# Allegro board ir_board-dvt-0514.brd
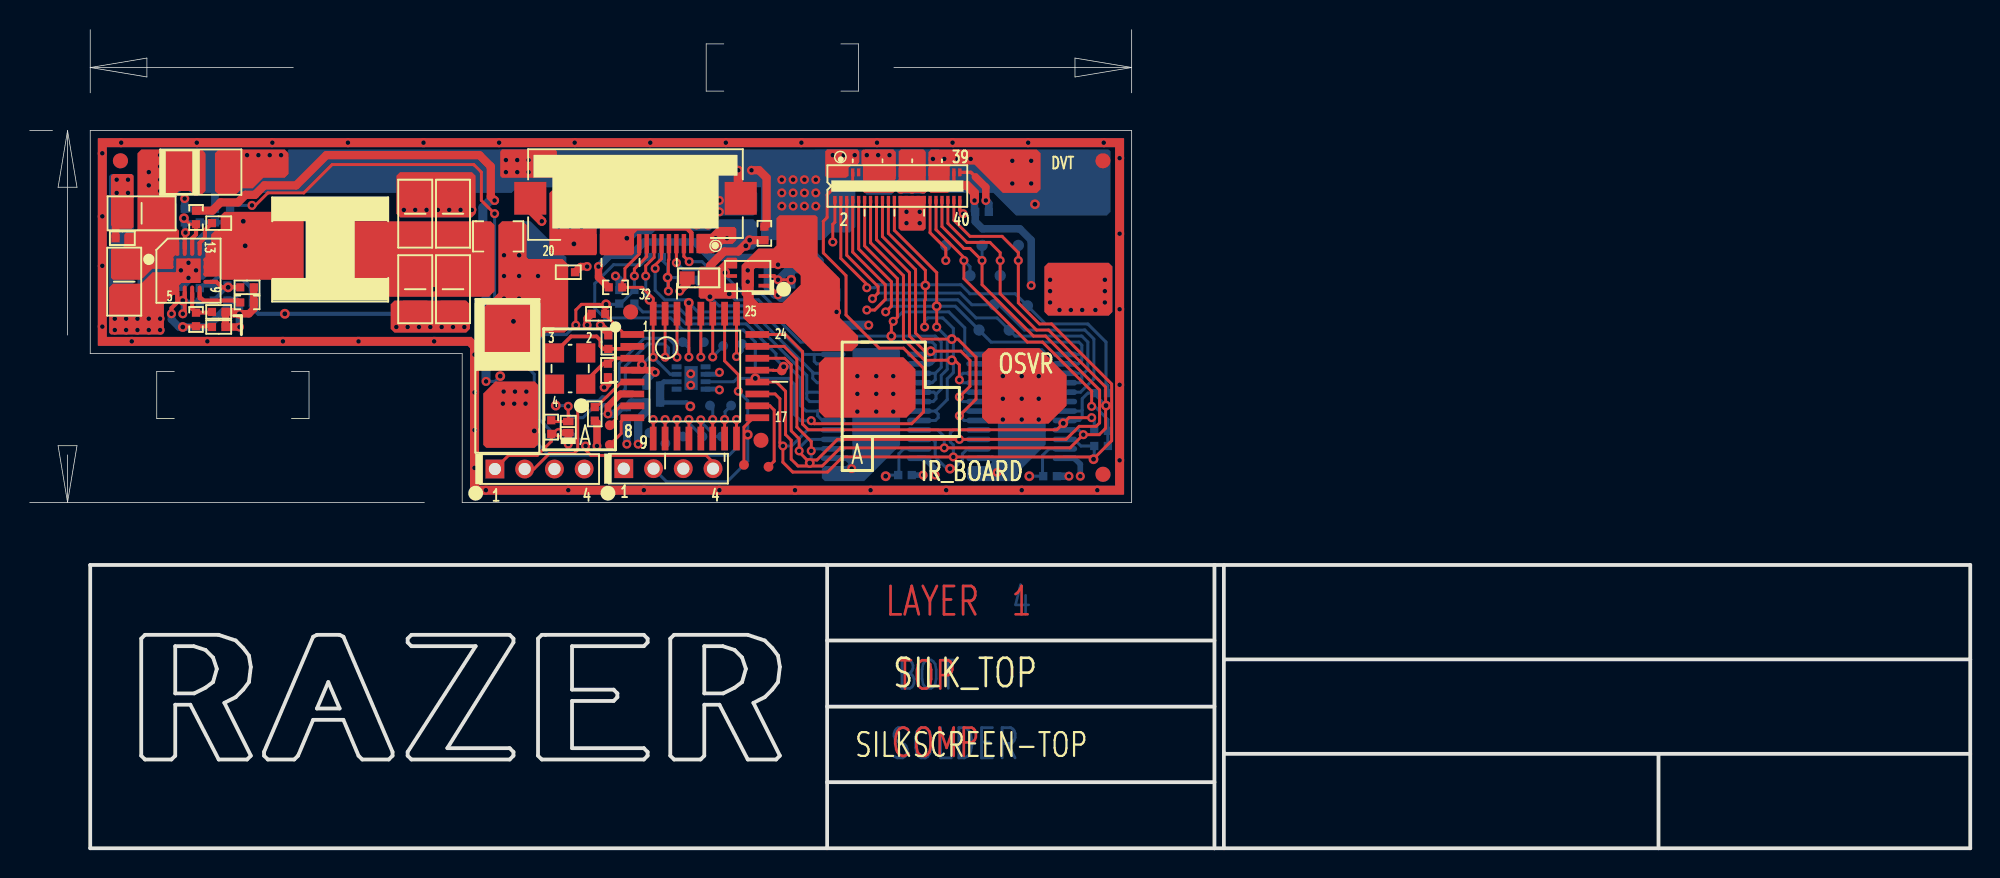
[diagram p0: board, top side]
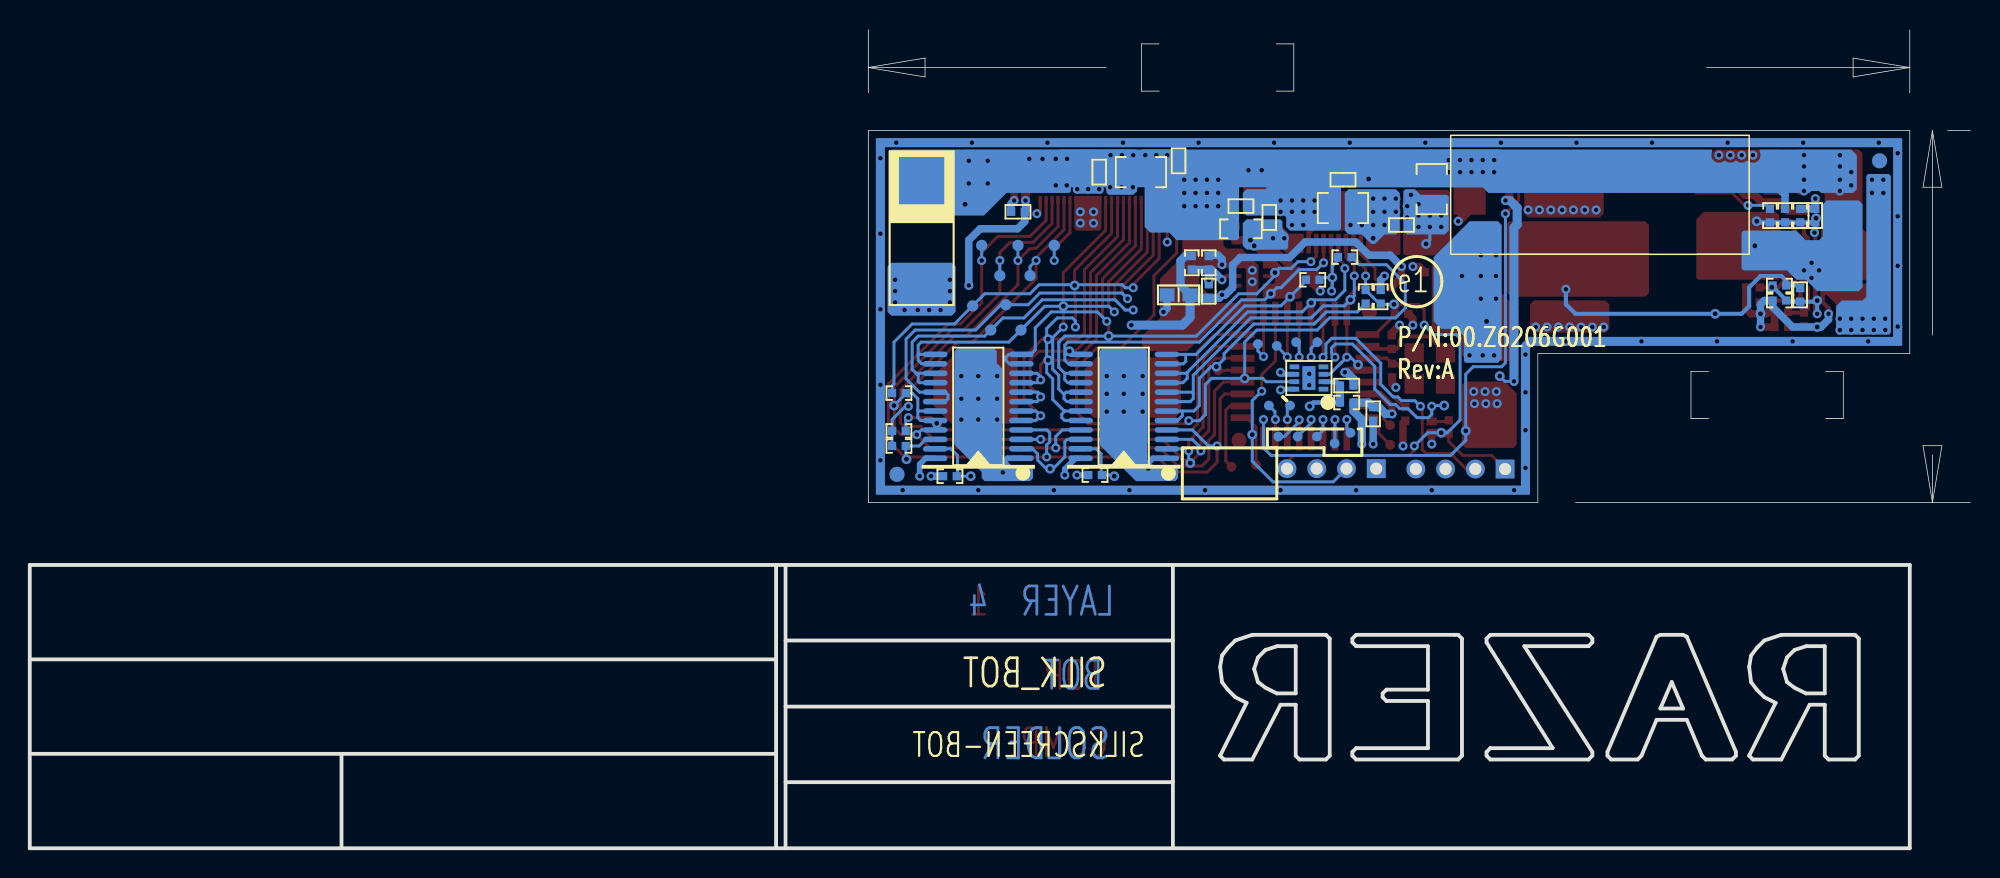
[diagram p1: board, bottom side, seen from below]

Outline 130.43 x 55.04 mm; copper layers: TOP, GND, VCC, BOTTOM. Coordinates in mm from the lower left corner of the outline.
Outline path: 4.06,48.26 74.06,48.26 74.06,23.26 29.06,23.26 29.06,33.26 4.06,33.26 4.06,48.26

## Placement (name value [footprint] x y rotation side)
C1  0.1uF  [C0402]  38.23 41.91 0 bottom
C2  6TPE220MAZB  [TANB]  11.68 45.47 0 top
C3  0.1uF  [C0402]  42.16 44.96 0 bottom
C4  0.1uF  [C0402]  53.21 46.23 90 bottom
C5  0.1uF  [C0402]  58.55 45.47 270 bottom
C6  4TPE470ML  [TAND]  70.49 41.53 270 bottom
C7  0.1uF  [C0402]  49.02 43.18 180 bottom
C8  0.1uF  [C0402]  47.12 42.42 90 bottom
C9  0.1uF  [C0402]  64.01 42.8 0 bottom
C10  NC_47uF  [C1206]  6.35 38.1 270 top
C11  47uF  [C1206]  7.52 42.7 180 top
C12  0.1uF  [C0402]  6.22 41.02 180 top
C13  390pF  [C0402]  11.43 37.21 270 bottom
C14  0.1uF/25V  [C0402]  12.7 42.04 180 top
C15  47uF  [C1206]  25.91 42.67 90 top
C16  47uF  [C1206]  28.45 42.67 90 top
C17  0.1uF  [C0402]  36.2 38.73 0 top
C18  0.1uF  [C0402]  10.41 42.55 270 bottom
C19  15nF  [C0402]  14.61 37.72 0 top
C20  2.7nF  [C0402]  12.7 35.05 0 top
C21  47uF  [C1206]  25.91 37.59 270 top
C22  47uF  [C1206]  28.45 37.59 270 top
C23  56pF  [C0402]  12.7 36.07 0 top
C24  0.1uF  [C0402]  51.18 37.46 90 bottom
C25  10uF  [C0603]  53.21 37.21 0 bottom
C26  10uF  [C0603]  44.96 38.35 180 top
C27  0.1uF  [C0402]  40.13 29.21 270 bottom
C28  NC_33pF  [C0402]  38.89 34.04 90 top
C29  4.7uF  [C0402]  37.97 29.21 270 top
C30  NC_33pF_NC  [C0402]  38.86 32.13 270 top
C31  0.1uF  [C0402]  38.23 35.94 0 top
C32  4.7uF  [C0402]  41.91 31.11 180 bottom
C33  4TPE470ML  [TAND]  32.11 31.6 270 top
D1  CDBQR0230L  [COMCHIP_CDBQR0230L-HF]  36.2 28.32 90 top
FFC  FFC  [TPC30T]  7.63 49.92 0 top
L1  2.2 uH  [VISHAY_IHLP-2525CZ-01]  20.19 40.26 180 top
NOREF  -  []  29.06 23.26 90 top
NOREF#2  -  [unnamed#2]  72.14 25.15 0 top
NOREF#3  -  []  4.06 48.26 0 top
NOREF#4  -  [unnamed#2]  72.14 46.23 0 top
NOREF#5  -  [unnamed#2]  6.1 46.23 0 top
NOREF#6  -  []  4.06 0 0 top
NOREF#7  -  [unnamed#2]  6.1 46.23 180 bottom
NOREF#8  -  [unnamed#2]  72.14 25.15 180 bottom
P1  ACES_50502-20_20PIN_FPC  [ACES_50502-20]  40.71 40.66 180 top
P2  JAE-WP7B-P040VA1  [JAE_WP7B-PXXXVA1]  58.31 44.53 0 top
P3  NO install  [JP4-2MM]  42.93 25.53 0 top
P4  NO install  [JP4-2MM]  34.26 25.5 0 top
PCB  PCB  [TPC30T]  9.74 49.92 0 top
R1  0  [R0805]  36.2 44.31 270 bottom
R2  0  [R0805]  42.15 43.05 180 bottom
R3  0  [R0805]  55.75 45.47 0 bottom
R4  0  [R0603]  49.02 41.66 180 bottom
R5  36.5K  [R0402]  12.83 37.85 180 bottom
R6  10K_NC  [R0402]  12.45 42.55 270 bottom
R7  10K  [R0402]  13.46 42.55 270 bottom
R8  0  [R0805]  31.5 41.15 0 top
R9  10K  [R0402]  11.43 42.55 270 bottom
R10  78.7K  [R0402]  14.61 36.7 0 top
R11  10K  [R0402]  12.83 36.83 180 bottom
R12  10K  [R0402]  11.18 42.42 270 top
R13  20.5K  [R0402]  11.18 35.56 270 top
R14  0  [R0402]  49.38 41.35 270 top
R16  52.3K  [R0402]  52.32 39.37 270 bottom
R17  30.1K  [R0402]  51.18 39.37 270 bottom
R19  0  [R0402]  72.01 30.61 0 bottom
R20  0  [R0402]  72.01 27.05 180 bottom
R21  330  [R0402]  58.83 25.1 180 bottom
R22  330  [R0402]  68.58 25.02 180 bottom
R23  NI  [R0402]  72.01 28.07 180 bottom
R24  4.99K  [R0402]  39.37 37.72 0 top
R25  120  [R0402]  35.05 28.32 90 top
R26  75  [R0402]  41.91 29.97 180 bottom
R27  0  [R0402]  40.64 37.08 270 bottom
R28  0_NC  [R0402]  39.62 37.08 90 bottom
R29  0  [R0402]  44.2 38.23 0 bottom
R30  0_NC  [R0402]  42.04 39.75 180 bottom
TP1  TP_1mm  [TPC30T#2]  66.45 40.54 180 bottom
TP2  TP_1mm  [TPC30T#2]  65.23 38.51 180 bottom
TP3  TP_1mm  [TPC30T#2]  64.01 40.54 180 bottom
TP4  TP_1mm  [TPC30T#2]  63.2 38.51 180 bottom
TP5  TP_1mm  [TPC30T#2]  61.57 40.54 180 bottom
TP6  TP_1mm  [TPC30T#2]  67.06 36.47 180 bottom
TP7  TP_1mm  [TPC30T#2]  64.82 36.55 180 bottom
TP8  TP_1mm  [TPC30T#2]  65.84 34.85 180 bottom
TP9  TP_1mm  [TPC30T#2]  63.8 34.85 180 bottom
TP10  TP_1mm  [TPC26T]  49.66 25.65 0 top
TP11  TP_1mm  [TPC26T]  50.55 32.13 0 top
TP12  TP_1mm  [TPC26T]  47.14 29.77 180 bottom
TP13  TP_1mm  [TPC26T]  45.72 29.77 180 bottom
TP14  TP_1mm  [TPC26T]  46.51 27.69 180 bottom
TP15  TP_1mm  [TPC26T]  45.21 27.69 180 bottom
TP16  TP_1mm  [TPC26T]  43.92 27.69 180 bottom
TP17  TP_1mm  [TPC26T]  42.72 27.23 180 bottom
TP18  TP_1mm  [TPC26T]  41.66 27.94 180 bottom
TP19  TP_1mm  [TPC26T]  38.99 27.13 0 top
TP20  TP_1mm  [TPC26T]  38.99 28.45 0 top
TP21  TP_1mm  [TPC26T]  48.01 25.78 0 top
TP22  TP_1mm  [TPC26T]  47.88 33.91 180 bottom
TP23  TP_1mm  [TPC26T]  46.61 33.78 180 bottom
TP24  TP_1mm  [TPC26T]  45.31 34.04 180 bottom
TP25  TP_1mm  [TPC26T]  43.89 34.04 180 bottom
U1  TPS54478RTET  [S-PWQFN-N16]  10.67 38.84 270 top
U2  TPS7A3701DRVT  [S-PWSON-N6]  48.26 38.48 90 top
U4  STP16CPC26XTR  [TSSOP24-G]  56.9 29.72 90 bottom
U5  STP16CPC26XTR  [TSSOP24-G]  66.67 29.72 90 bottom
U6  STM8S003K3T6CTR  [LQFP32-0_8MM]  44.7 31.75 270 top
U7  VSOP58438  [VSOP8-G]  44.45 31.62 90 bottom
Y1  NC_TXC_7V_16MHz  [TXC_7V]  36.32 32.26 90 top

## Library data of the parts
C1 C3-C5 C7-C9 C12 C14 C17 C18 C24 C27 C31 = CAP_6
C2 C6 C33 = C_D_KO CAP 150U M 6_0.3V
C10 C11 C15 C16 C21 C22 C25 C26 = CAP_0
C13 C19 C30 = CAP NP
C20 C23 = CAP_NP
C28 = CAP NP_0
C29 C32 = CAPCC 0402_1
D1 = DIODE ZENER_0
FFC PCB TP1-TP25 = T POINT R
L1 = INDUCTOR
P1 = CON2_3
P2 = CON34_0
P3 P4 = 53261-0371_3
R1-R14 R16 R17 R19-R30 = R_RP_3
U1 = TPS54218RTER
U2 = TPS7A37_1
U4 U5 = STP16CPC26XTR_4
U6 = STM8S003K3T6CTR_1
U7 = VSOP5843_0
Y1 = CRYSTAL_1

## Footprints (pads in the part's own frame, mm; a bottom-side part is the same pattern mirrored in y, then rotated)
ACES_50502-20
  rect 0.305x1.295 smd: 1(-4.75,0) 2(-4.25,0) 3(-3.75,0) 4(-3.25,0) 5(-2.75,0) 6(-2.25,0) 7(-1.75,0) 8(-1.25,0) 9(-0.75,0) 10(-0.25,0) 11(0.25,0) 12(0.75,0) 13(1.25,0) 14(1.75,0) 15(2.25,0) 16(2.75,0) 17(3.25,0) 18(3.75,0) 19(4.25,0) 20(4.75,0)
  rect 2.159x2.21 smd: S1(-7.075,-3.05) S2(7.075,-3.05)
C0402
  rect 0.559x0.559 smd: 1(-0.457,0) 2(0.457,0)
C0603
  rect 1.016x0.889 smd: 1(-0.775,0) 2(0.775,0)
C1206
  rect 1.27x1.651 smd: 1(-1.397,0) 2(1.397,0)
COMCHIP_CDBQR0230L-HF
  rect 0.508x0.711 smd: A(0.375,0) C(-0.375,0)
JAE_WP7B-PXXXVA1
  rect 0.229x0.533 smd: 1(-3.8,0.925) 2(-3.8,-0.925) 3(-3.4,0.925) 4(-3.4,-0.925) 5(-3,0.925) 6(-3,-0.925) 7(-2.6,0.925) 8(-2.6,-0.925) 9(-2.2,0.925) 10(-2.2,-0.925) 11(-1.8,0.925) 12(-1.8,-0.925) 13(-1.4,0.925) 14(-1.4,-0.925) 15(-1,0.925) 16(-1,-0.925) 17(-0.6,0.925) 18(-0.6,-0.925) 19(-0.2,0.925) 20(-0.2,-0.925) 21(0.2,0.925) 22(0.2,-0.925) 23(0.6,0.925) 24(0.6,-0.925) 25(1,0.925) 26(1,-0.925) 27(1.4,0.925) 28(1.4,-0.925) 29(1.8,0.925) 30(1.8,-0.925) 31(2.2,0.925) 32(2.2,-0.925) 33(2.6,0.925) 34(2.6,-0.925) 35(3,0.925) 36(3,-0.925) 37(3.4,0.925) 38(3.4,-0.925) 39(3.8,0.925) 40(3.8,-0.925) S1(-4.2,0.925) S2(-4.2,-0.925) S3(4.2,0.925) S4(4.2,-0.925)
JP4-2MM
  rect 1.27x1.27 hole 0.813: 1(-3,0)
  round 1.27 hole 0.813: 2(-1,0) 3(1,0) 4(3,0)
LQFP32-0_8MM
  rect 0.457x1.6 smd: 1(-2.8,-4.2) 2(-2,-4.2) 3(-1.2,-4.2) 4(-0.4,-4.2) 5(0.4,-4.2) 6(1.2,-4.2) 7(2,-4.2) 8(2.8,-4.2) 17(2.8,4.2) 18(2,4.2) 19(1.2,4.2) 20(0.4,4.2) 21(-0.4,4.2) 22(-1.2,4.2) 23(-2,4.2) 24(-2.8,4.2)
  rect 1.6x0.457 smd: 9(4.2,-2.8) 10(4.2,-2) 11(4.2,-1.2) 12(4.2,-0.4) 13(4.2,0.4) 14(4.2,1.2) 15(4.2,2) 16(4.2,2.8) 25(-4.2,2.8) 26(-4.2,2) 27(-4.2,1.2) 28(-4.2,0.4) 29(-4.2,-0.4) 30(-4.2,-1.2) 31(-4.2,-2) 32(-4.2,-2.8)
  round 1.016 smd: S1(4.318,4.445) S2(-4.318,-4.318)
R0402
  rect 0.559x0.559 smd: 1(-0.457,0) 2(0.457,0)
R0603
  rect 1.016x0.889 smd: 1(-0.775,0) 2(0.775,0)
R0805
  rect 1.143x1.397 smd: 1(-0.953,0) 2(0.953,0)
S-PWQFN-N16
  oval 0.279x1.016 smd: 1(-0.75,-1.5) 2(-0.25,-1.5) 3(0.25,-1.5) 4(0.75,-1.5) 9(0.75,1.5) 10(0.25,1.5) 11(-0.25,1.5) 12(-0.75,1.5)
  oval 1.016x0.279 smd: 5(1.5,-0.75) 6(1.5,-0.25) 7(1.5,0.25) 8(1.5,0.75) 13(-1.5,0.75) 14(-1.5,0.25) 15(-1.5,-0.25) 16(-1.5,-0.75)
  rect 1.651x1.651 smd: 17(0,0)
S-PWSON-N6
  rect 0.254x0.66 smd: 1(-0.65,-1.05) 2(0,-1.05) 3(0.65,-1.05) 4(0.65,1.05) 5(0,1.05) 6(-0.65,1.05)
  rect 1.397x0.813 smd: 7(0,0)
TANB
  rect 1.27x2.54 smd: 1(-1.651,0) 2(1.651,0)
TAND
  rect 2.337x2.667 smd: 1(-3.391,0) 2(3.391,0)
TPC26T
  round 0.66 smd: 1(0,0)
TPC30T
  round 0 smd: 1(0,0)
TPC30T#2
  round 0.762 smd: 1(0,0)
TSSOP24-G
  oval 0.381x1.651 smd: 1(-3.493,-2.9) 2(-2.857,-2.9) 3(-2.223,-2.9) 4(-1.587,-2.9) 5(-0.953,-2.9) 6(-0.318,-2.9) 7(0.318,-2.9) 8(0.953,-2.9) 9(1.587,-2.9) 10(2.223,-2.9) 11(2.857,-2.9) 12(3.493,-2.9) 13(3.493,2.9) 14(2.857,2.9) 15(2.223,2.9) 16(1.587,2.9) 17(0.953,2.9) 18(0.318,2.9) 19(-0.318,2.9) 20(-0.953,2.9) 21(-1.587,2.9) 22(-2.223,2.9) 23(-2.857,2.9) 24(-3.493,2.9)
  rect 4.978x3.2 smd: 25(0,0)
TXC_7V
  rect 1.295x1.295 smd: 1(-1.05,-1.05) 2(1.05,-1.05) 3(1.05,1.05) 4(-1.05,1.05)
unnamed#2
  round 1.016 smd: 1(0,0)
VISHAY_IHLP-2525CZ-01
  rect 2.489x3.505 smd: 1(-3.1,0) 2(3.1,0)
VSOP8-G
  rect 0.33x0.66 smd: 1(-0.75,-0.975) 2(-0.25,-0.975) 3(0.25,-0.975) 4(0.75,-0.975) 5(0.75,0.975) 6(0.25,0.975) 7(-0.25,0.975) 8(-0.75,0.975)
  rect 1.6x0.889 smd: 9(0,0)

## Nets
2V8: C4.1 C7.1 C17.1 C33.1 R3.1(L) R4.1(L) R8.2(R)
2V8_HMD: C8.1 P1.1 P1.2 R4.2(R)
2V8_PG: R12.2(R) U1.14(PWRGD)
2V8IN: C5.1 C6.1 P2.9 P2.11 P2.13 P2.15 P2.17 P2.19 P2.31 P2.33 P2.35 P2.37 R3.2(R)
AGND: C2.2 C3.2 C4.2 C5.2 C6.2 C7.2 C8.2 C9.2 C10.2 C11.2 C12.2 C15.2 C16.2 C17.2 C18.1 C19.2 C20.2 C21.2 C22.2 C23.2 C25.2 C26.2 C27.2 C28.2 C29.2 C30.2 C31.1 C32.2 C33.2 P1.S1 P1.S2 P2.1 P2.3 P2.21 P2.22 P2.23 P2.24 P2.25 P2.26 P2.27 P2.28 P2.29 P2.30 P2.S1 P2.S2 P2.S3 P2.S4 P3.3 P4.3 R2.1(L) R9.1(L) R10.2(R) R11.1(L) R17.1(L) R21.1(L) R22.1(L) R28.2(R) U1.3(GND0) U1.4(GND1) U1.5(AGND0) U1.17(POWER_PAD) U2.3(GND) U2.7(EP) U4.1(GND) U4.25(THM_G) U5.1(GND) U5.25(THM_G) U6.4(V SS) U7.6(GND1) U7.8(GND2) U7.9(EP)
GND_IN: C1.2 P1.3 P1.11 P1.12 P1.13 P1.14 P1.15 R2.2(R)
VCC_5V: C2.1 C3.1 C10.1 C11.1 C12.1 R1.1(L) R6.1(L) R14.1(L) U1.1(VIN1) U1.2(VIN2) U1.16(VIN0)
VCC_5VIN: C1.1 P1.16 P1.17 P1.18 P1.19 P1.20 R1.2(R)
3D3: C9.1 C24.1 C25.1 C27.1 D1.C(CATHODE) P2.39 P3.1 R12.1(L) R16.1(L) R24.1(L) R26.2(R) U2.1(OUT) U4.24(VDD) U5.24(VDD) U6.6(VDD)
DATA0: U4.2(SDI) U6.23(PC6 (HS)/SPI_MOSI)
DATA1: R23.2(R) U6.24(PC7 (HS)/SPI_MISO)
DD_BST: C14.2 U1.13(BOOT)
DD_COM1: C20.1 R13.2(R)
DD_COMP: C23.1 R13.1(L) U1.7(COMP)
DD_EN: C18.2 R6.2(R) R7.2(R) R9.2(R) U1.15(EN)
DD_OUT: C13.1 C15.1 C16.1 C21.1 C22.1 L1.1 R5.2(R) R8.1(L)
DD_RT: R10.1(L) U1.8(RT/CLK)
DD_SS: C19.1 U1.9(SS)
DD_SW: C14.1 L1.2 U1.10(PH0) U1.11(PH1) U1.12(PH2)
DD_VSNS: C13.2 R5.1(L) R11.2(R) U1.6(VSENSE)
DRVCLK: P2.36 TP3.1(TP) U4.3(CLK) U5.3(CLK) U6.22(PC5 (HS)/SPI_SCK)
EC_OSCIN: C28.1 U6.2(OSCIN/PA1) Y1.3
EC_OSCOUT: C30.1 U6.3(OSCOUT/PA2) Y1.1
EC_VCAP: C29.1 U6.5(VCAP)
IR_LED_IN: P2.5 R30.2(R) U7.7(IN)
LATEN: P2.40 TP1.1(TP) U4.4(LE) U5.4(LE) U6.19(PC2 (HS) /TIM1_CH2)
LDO_FBA: C24.2 R16.2(R) R17.2(R) U2.2(FB)
LDO_INA: C26.1 R14.2(R) U2.4(EN) U2.6(IN)
LED1: R27.2(R) U4.5(OD0) U4.6(OD1)
LED1_IN: P1.9 R27.1(L) R28.1(L)
LED2: P1.8 U4.7(OD2) U4.8(OD3)
LED3: P1.7 U4.9(OD4) U4.10(OD5)
LED4: R29.2(R) U4.11(OD6) U4.12(OD7)
LED5: P1.5 U4.13(OD8) U4.14(OD9)
LED6: P1.4 U4.15(OD10) U4.16(OD11)
LED7: P2.20 U4.17(OD12) U4.18(OD13)
LED8: P2.18 U4.19(OD14) U4.20(OD15)
LED9: P2.16 U5.5(OD0) U5.6(OD1)
LED10: P2.14 U5.7(OD2) U5.8(OD3)
LED11: P2.12 U5.9(OD4) U5.10(OD5)
LED12: P2.10 U5.11(OD6) U5.12(OD7)
LED13: P2.8 TP9.1(TP) U5.13(OD8) U5.14(OD9)
LED14: P2.6 TP8.1(TP) U5.15(OD10) U5.16(OD11)
LED15: P2.4 TP7.1(TP) U5.17(OD12) U5.18(OD13)
LED16: P2.2 R19.2(R) TP6.1(TP)
LED16_1: R19.1(L) U5.19(OD14) U5.20(OD15)
LED_PTD: P1.6 R29.1(L) R30.1(L)
LED_PWR_EN: R7.1(L) U6.16(TIM1_CH1N/AIN0/(HS) PB0)
OUTEN: P2.38 TP2.1(TP) U4.21(O\E\) U5.21(O\E\) U6.20(PC3 (HS) /TIM1_CH3)
REXTA: R21.2(R) U4.23(R-EXT)
REXTB: R22.2(R) U5.23(R-EXT)
SDI: P2.34 R20.1(L) R23.1(L) TP4.1(TP)
SDO1: U4.22(SDO) U5.2(SDI)
SDO2: R20.2(R) U5.22(SDO)
SDO_BACK: P2.32 TP5.1(TP)
SWIM_DATA: P3.2 U6.26(PD1 (HS)/SWIM)
UART_RX: D1.A(ANODE) R25.2(R) U6.31(PD6 (HS)/UART1_RX)
UART_RX1: P4.1 R25.1(L)
UART_TX: P4.2 U6.30(PD5 (HS)/UART1_TX)
UPU_RES: C31.2 P3.4 U6.1(NRST)
VERTICAL_SYNC: P1.10 R24.2(R) U6.32(PD7 (HS)/TLI [ TIM1_CH4]) U7.3(OUT)
VS: C32.1 R26.1(L) U7.2(VS)
N16006904: TP10.1(TP) U6.18(PC1 (HS) /TIM1_CH1/UART1_CK)
N16006928: TP11.1(TP) U6.21(PC4 (HS) /TIM1_CH4/CLK_CCO)
N16007072: TP12.1(TP) U6.15(TIM1_CH2N/ AIN1/(HS) PB1)
N16007076: TP13.1(TP) U6.14(TIM1_CH3N/ AIN2/ (HS) PB2)
N16007080: TP14.1(TP) U6.13(TIM1_ETR/AIN3/(HS) PB3)
N16007084: TP15.1(TP) U6.12(I2C_SCL/(T) PB4)
N16007088: TP16.1(TP) U6.11(I2C_SDA/ (T) PB5)
N16007096: TP17.1(TP) U6.10(PB6)
N16007100: TP18.1(TP) U6.9(PB7)
N16007406: TP21.1(TP) U6.17(PE5 (HS) /SPI_NSS)
N16007454: TP19.1(TP) U6.8(PF4)
N16007512: TP20.1(TP) U6.7([SPI_NSS] TIM2_CH3/(HS)PA3)
N16007570: TP22.1(TP) U6.25(PD0 (HS)/ TIM1_BKIN [CLK_CCO)
N16007642: TP23.1(TP) U6.27(PD2 (HS) [TIM2_CH3])
N16007646: TP24.1(TP) U6.28(PD3 (HS)/TIM2_CH2/ADC_ETR)
N16007650: TP25.1(TP) U6.29(PD4 (HS)/BEEP/TIM2_CH1)

Pads without a net: FFC 1; NOREF#2 1; NOREF#4 1; NOREF#5 1; NOREF#7 1; NOREF#8 1; P2 7; P4 4; PCB 1; U2 5; U6 S1 S2; U7 1 4 5; Y1 2 4

## Via types
v1: diameter 0.61, hole 0.305, TOP to BOTTOM, 310 vias
v2: diameter 0.66, hole 0.33, TOP to BOTTOM, 45 vias

## Routing (per net, layer and track width the routed paths; a pad name or vN(x,y) marks a point on that pad's centre or on a via; arc(x,y) is an arc through that point)
2V8:
  vias: v1(31.88,39.88) v1(31.88,38.48) v1(31.88,36.96) v1(32,33.15) v1(32.77,33.15) v1(32.89,39.88) v1(32.89,38.48) v1(32.89,36.96) v1(33.66,33.15) v1(34.16,38.48) v1(50.55,44.96) v1(50.55,44.07) v1(50.55,43.18) v1(51.31,44.96) v1(51.31,44.07) v1(51.31,43.18) v1(52.07,44.96) v1(52.07,44.07) v1(52.07,43.18) v1(52.83,44.96) v1(52.83,44.07) v1(52.83,43.18) v2(32.51,35.43)
2V8_HMD:
  vias: v1(46.1,41.02) v1(46.86,41.02) v2(48.13,40.51)
2V8_PG: length 2.7
  TOP w0.203: v2(10.36,42.37) 10.77,41.96 R12.2
  TOP w0.279: U1.14 10.92,41.02 11.18,41.27 R12.2
2V8IN:
  vias: v1(56.26,46.61) v1(56.29,44.45) v1(57.02,46.61) v1(57.05,44.45) v1(57.78,46.61) v1(57.81,44.45) v1(60.71,46.35) v1(60.73,44.58) v1(61.47,46.35) v1(61.47,44.58) v1(62.36,46.35) v1(63.25,46.35) v1(66.04,46.23) v1(66.04,44.7) v1(67.31,46.23) v1(67.31,44.7) v2(67.56,43.31)
AGND: length 51.8
  TOP w0.203: P2.S2 54.11,42.1 53.98,41.96 v1(53.98,40.77)
  TOP w0.229: v1(62.74,42.67) 62.51,42.9 P2.S4 ; P2.S3 63.26,45.46 63.56,45.15
  TOP w0.279: v1(9.53,35.94) 9.53,36.32 9.92,36.71 U1.5
  TOP w0.457: v1(42.04,32) 41.89,32.15 U6.4
  TOP w0.508: C11.2 5.77,42.34 C12.2 ; v1(38.13,27.05) 38.13,28.6 C29.2 ; v1(37.47,35.18) 37.47,35.64 C31.1 ; v1(37.47,39.12) 37.03,39.12 C17.2 ; C28.2 38.89,34.65 v1(38.35,35.18) ; v1(38.61,30.99) 38.86,31.24 C30.2 ; C26.2 44.18,37.96 v1(43.69,37.46) ; v1(14.1,35.05) C20.2 C23.2 13.59,36.07 13.72,35.94 14.73,35.94 15.06,36.27 R10.2 C19.2 ; v1(64.26,43.56) 64.26,44.45 63.56,45.15
  TOP w0.61: v1(47.62,45.59) 47.62,43.87 P1.S1 ; v1(34.42,42.16) 33.64,42.94 P1.S2
  BOTTOM w0.33: U7.8 46.3,30.87 v1(46.35,30.82) ; v1(46.35,32) 46.22,31.87 U7.6
  BOTTOM w0.381: U4.1 54.93,26.23 55.24,25.91 v1(55.24,25.53) ; U5.1 64.71,26.23 65.02,25.91 v1(65.02,25.27) ; R21.1 v1(60.05,25.1)
  BOTTOM w0.508: C9.2 64.47,43.36 v1(64.26,43.56) ; C25.2 53.99,36.31 v1(54.23,36.07) ; v1(39.37,38.48) 39.62,38.23 R28.2 ; R17.1 51.13,39.88 50.55,39.88 50.29,39.62 v1(50.29,39.24) ; R22.1 v1(69.85,25.02) ; v1(10.41,43.69) C18.1 R9.1 ; v1(40.13,27.18) C27.2 ; v1(9.53,35.94) 9.53,35.56 10.03,35.05 11.94,35.05 13.28,36.4 R11.1 13.84,36.83 14.1,36.58 v2(14.1,35.94) v1(14.1,35.05)
  BOTTOM w0.559: v1(42.04,32) 41.91,32 41.45,31.55 C32.2
  vias: v1(4.88,46.74) v1(4.88,42.49) v1(4.88,39.17) v1(4.88,35.08) v1(5.71,35.61) v1(5.71,34.85) v1(5.84,44.96) v1(5.84,44.07) v1(6.15,47.45) v1(6.48,35.61) v1(6.48,34.85) v1(6.6,44.96) v1(6.6,44.07) v1(6.86,34.09) v1(7.24,35.61) v1(7.24,34.85) v1(8,35.61) v1(8,34.85) v1(8.76,35.61) v1(8.76,34.85) v1(10.16,38.86) v1(10.67,39.37) v1(10.67,38.35) v1(11.18,38.86) v1(11.23,47.45) v1(11.94,34.09) v1(14.61,46.61) v1(15.37,46.61) v1(16.13,46.61) v1(16.31,47.45) v1(16.89,46.61) v1(17.02,34.09) v1(21.39,47.45) v1(22.1,34.09) v1(24.64,35.05) v1(25.15,42.93) v1(25.4,35.05) v1(25.91,42.93) v1(26.16,35.05) v1(26.47,47.45) v1(26.67,42.93) v1(26.92,35.05) v1(27.18,34.09) v1(27.43,42.93) v1(27.69,35.05) v1(28.19,42.93) v1(28.45,35.05) v1(28.96,42.93) v1(29.21,35.05) v1(29.72,42.93) v1(29.9,33.2) v1(29.9,30.66) v1(29.9,28.12) v1(29.9,25.58) v1(30.66,24.08) v1(31.55,47.45) v1(31.8,29.9) v1(31.85,30.71) v1(32.61,30.71) v1(32.56,29.9) v1(33.38,30.71) v1(33.32,29.9) v1(36.2,24.08) v1(36.63,47.45) v1(41.27,24.08) v1(41.71,47.45) v1(44.07,43.56) v1(44.07,42.8) v1(44.42,31.9) v1(44.42,31.14) v1(44.83,43.56) v1(44.83,42.8) v1(44.83,41.91) v1(45.59,43.56) v1(45.59,42.8) v1(45.59,41.91) v1(46.35,43.56) v1(46.35,42.8) v1(46.35,24.08) v1(46.79,47.45) v1(48.26,38.86) v1(48.26,38.1) v1(51.44,24.08) v1(51.87,47.45) v1(53.98,46.61) v1(54.71,46.61) v1(55.45,46.61) v1(55.63,31.75) v1(55.63,30.56) v1(55.63,29.36) v1(56.52,24.08) v1(56.9,31.75) v1(56.9,30.56) v1(56.9,29.36) v1(56.95,47.45) v1(58.04,31.75) v1(58.04,30.56) v1(58.04,29.36) v1(58.55,44.32) v1(58.93,42.8) v1(58.93,42.04) v1(59.28,44.32) v1(59.82,42.8) v1(59.82,42.04) v1(60.02,44.32) v1(61.59,24.08) v1(62.03,47.45) v1(65.41,31.75) v1(65.41,30.23) v1(65.41,28.83) v1(66.67,31.75) v1(66.67,30.23) v1(66.67,28.83) v1(66.67,24.08) v1(67.11,47.45) v1(67.82,31.75) v1(67.82,30.23) v1(67.82,28.83) v1(68.58,38.23) v1(68.58,37.46) v1(68.58,36.7) v1(69.22,36.2) v1(69.98,36.2) v1(70.74,36.2) v1(71.63,36.2) v1(71.75,24.08) v1(72.19,47.45) v1(72.26,38.23) v1(72.26,37.46) v1(72.26,36.7) v1(73.25,46.41) v1(73.25,41.33) v1(73.25,36.25) v1(73.25,31.17) v1(73.25,26.09)
GND_IN: length 3.8
  TOP w0.305: P1.3 44.46,41.39 43.31,42.55 41.91,42.55
  vias: v1(38.61,43.69) v1(38.61,42.8) v1(39.37,43.69) v1(39.37,42.8) v1(39.37,41.91) v1(40.13,43.69) v1(40.13,42.8) v1(40.13,41.91) v1(40.89,41.91) v1(41.66,41.91) v2(40.13,41.02)
VCC_5V: length 6.2
  TOP w0.559: R14.1 49.53,41.96 49.53,45.09 49.02,45.59 v1(48.51,45.59)
  BOTTOM w0.508: R6.1 12.45,43.94 12.95,44.45
  vias: v1(8,45.47) v1(8,44.58) v1(8.76,46.61) v1(8.76,45.85) v1(8.76,44.96) v1(8.76,44.2) v1(11.18,46.61) v1(11.18,45.85) v1(11.18,44.96) v1(11.18,44.2) v1(32,46.28) v1(32,45.47) v1(32.77,46.28) v1(32.77,45.47) v1(33.53,46.28) v1(33.53,45.47) v1(34.29,46.28) v1(34.29,45.47) v1(35.05,46.28) v1(35.05,45.47) v2(40.44,45.01)
VCC_5VIN: length 1.2
  BOTTOM w0.203: v2(36.58,40.64) 36.32,40.89 v1(36.32,41.78)
  vias: v1(35.56,42.55) v1(35.56,41.78) v1(36.32,42.55) v1(37.08,43.31) v1(37.08,42.55) v1(37.08,41.78) v1(37.59,43.94) v1(37.85,43.18) v1(37.85,42.42)
3D3: length 92
  TOP w0.229: 62.36,44.58 62.11,44.82 P2.39
  TOP w0.254: U2.1 49.67,37.83 v1(50.29,37.21)
  TOP w0.457: U6.6 39.69,30.55 38.86,29.72 v1(38.86,29.21)
  TOP w0.508: D1.C v1(36.2,27.18) ; R24.1 38.23,38.4 v1(38.23,39.12)
  TOP w0.559: R12.1 12.27,42.88 12.83,43.43 14,43.43 14.5,43.94 15.14,43.94 15.77,44.58 17.91,44.58 19.94,46.61 30.23,46.61 30.99,45.85 30.99,43.82 v1(31.24,43.56)
  TOP w0.61: v1(63.5,43.56) 63.5,44.07 62.99,44.58 62.36,44.58
  BOTTOM w0.203: v1(30.67,31.39) 31.27,31.39 v2(31.62,31.75)
  BOTTOM w0.381: v1(70.61,25.02) 70.61,25.82 70.21,26.23 U5.24 ; v1(60.86,25.1) 60.86,25.5 60.13,26.23 U4.24
  BOTTOM w0.508: v1(67.31,37.85) 67.31,40.89 66.55,41.66 64.03,41.66 63.55,42.14 C9.1 63.5,42.85 v1(63.5,43.56) ; v1(38.23,39.12) 38.99,39.88 40.41,39.88 41.3,40.77 44.7,40.77 45.75,39.73 49.07,39.73 49.58,39.22 49.58,37.69 50.06,37.21 v1(50.29,37.21)
  BOTTOM w0.559: R16.1 52.76,39.83 53.09,39.5 53.09,37.86 C25.1 52.24,37.01 C24.1 50.5,37.01 v1(50.29,37.21) ; v1(40.89,27.18) 40.89,28.83 41.45,29.39 R26.2 40.44,29.97 C27.1 39.75,29.67 39.29,29.21 v1(38.86,29.21)
  BOTTOM w0.61: v1(56.39,35.18) 52.96,35.18 52.44,35.7 C25.1 ; v1(31.24,43.56) 30.94,43.56 30.46,43.08 30.46,41.93 30.67,41.72 v1(30.67,31.39)
DATA0: length 12
  TOP w0.203: U6.23 50.71,33.75 51.56,32.89 51.56,28.32 52.53,27.36 v1(52.53,26.72)
  BOTTOM w0.203: v2(52.43,25.91) 52.53,26.01 v1(52.53,26.72) 52.67,26.86 U4.2
DATA1: length 29.3
  TOP w0.203: U6.24 50.79,34.55 51.94,33.4 51.94,28.52 52.32,28.14 69.04,28.14 v2(69.47,28.57) 69.85,28.96 v1(71.37,28.96)
  BOTTOM w0.203: v1(71.37,28.96) 71.55,28.78 R23.2
DD_BST: length 2
  TOP w0.279: C14.2 11.77,41.57 11.77,41.06 11.42,40.71 U1.13
DD_COM1: length 2
  TOP w0.279: v2(10.29,35.05) 10.34,35.1 R13.2 12.19,35.1 C20.1
DD_COMP: length 2.5
  TOP w0.279: U1.7 10.92,36.28 R13.1 12.19,36.02 C23.1
DD_EN: length 5.8
  TOP w0.279: v1(10.47,41.4) 10.42,41.35 U1.15
  BOTTOM w0.305: v2(14.35,42.16) 14.27,42.09 R7.2 R6.2 R9.2 C18.2 10.41,41.45 v1(10.47,41.4)
DD_OUT: length 19.3
  BOTTOM w0.279: C13.1 11.61,37.85 R5.2 12.37,38.15 12.7,38.48 14.1,38.48 14.86,37.72 14.86,36.45 15.37,35.94 v2(17.14,35.94) 26.54,35.94 27.18,36.58 v1(27.18,37.59)
DD_RT: length 3.1
  TOP w0.279: R10.1 14.02,36.83 11.68,36.83 11.42,37.1 U1.8
DD_SS: length 2.1
  TOP w0.279: C19.1 v2(13.34,37.72) 12.9,37.72 12.54,38.09 U1.9
DD_SW:
  vias: v2(14.48,40.51)
DD_VSNS: length 5.9
  TOP w0.279: U1.6 10.42,36.07 v1(10.29,35.94)
  BOTTOM w0.279: R5.1 13.28,37.77 12.37,36.86 R11.2 12.29,36.75 C13.2 10.36,36.75 v2(10.29,36.83) v1(10.29,35.94)
DRVCLK: length 55.1
  TOP w0.203: U6.22 50.74,32.95 51.18,32.51 51.18,28.07 51.71,27.53 v1(51.71,26.72) 51.71,26.64 52.25,26.11 52.91,26.11 54.29,27.5 v1(62.48,27.5) 69.66,27.5 70.54,28.37 71.68,28.37 71.91,28.6 71.91,30.81 68.28,34.44 67.46,34.44 64.01,37.9 v1(64.01,39.52) 63.2,40.34 62.79,40.34 61.31,41.81 P2.36
  BOTTOM w0.203: v1(62.48,27.5) U5.3 ; U4.3 52.29,27.5 51.71,26.92 v1(51.71,26.72) ; TP3.1 v1(64.01,39.52)
EC_OSCIN: length 6.3
  TOP w0.254: U6.2 40.33,33.58 C28.1 38.56,33.58 38.35,33.78 38.35,34.16 38.1,34.42 36.38,34.42 Y1.3
EC_OSCOUT: length 4
  TOP w0.254: Y1.1 37.37,31.4 38.56,32.59 C30.1 39.22,32.95 U6.3
EC_VCAP: length 3.2
  TOP w0.203: C29.1 38.08,29.67 39.51,31.09 39.78,31.35 U6.5
IR_LED_IN: length 59
  TOP w0.203: v1(52.53,28.75) 52.73,28.55 59.28,28.55 60.07,29.34 60.07,32.28 58.72,33.63 57.1,33.63 54.86,35.86 54.86,38.51 53.34,40.03 53.34,42.16 53.59,42.42 53.59,43.94 53.98,44.32 54.99,44.32 55.31,44.65 P2.5
  BOTTOM w0.203: v2(48.77,31.6) 47.55,31.6 47.32,31.37 U7.7 ; v2(48.77,31.6) 51,31.6 51.41,31.19 51.41,29.16 51.82,28.75 v1(52.53,28.75) ; v2(48.77,31.6) 48.77,34.04 47.96,34.85 43.89,34.85 43.08,35.66 38.63,35.66 37.97,36.32 37.97,37.97 39.24,39.24 41.07,39.24 R30.2
LATEN: length 60.1
  TOP w0.203: P2.40 62.11,42.23 63.2,41.15 65.35,41.15 66.45,40.06 v1(66.45,39.52) 66.45,36.68 67.87,35.26 68.68,35.26 72.72,31.22 72.72,27.41 71.63,26.31 v1(62.08,26.31) 54.64,26.31 53.62,25.3 51.28,25.3 50.62,25.96 v1(50.62,27.05) 50.42,27.25 50.42,30.23 50.1,30.55 U6.19
  BOTTOM w0.203: U5.4 62.06,28.13 61.87,27.94 61.87,27.33 62.08,27.13 v1(62.08,26.31) ; U4.4 52.29,28.13 51.21,27.05 v1(50.62,27.05) ; TP1.1 v1(66.45,39.52)
LDO_FBA: length 5.3
  TOP w0.203: v2(51.18,38.23) v1(50.29,38.23)
  TOP w0.254: v1(50.29,38.23) 50.04,38.48 U2.2
  BOTTOM w0.508: v1(50.29,38.23) 50.98,38.91 R17.2 ; R17.2 R16.2 ; R17.2 C24.2
LDO_INA: length 5.2
  TOP w0.559: R14.2 v2(48.39,40.89) 47.62,40.13 46.69,40.13 45.73,39.18 C26.1
LED1: length 19.1
  BOTTOM w0.203: 52.96,29.4 U4.6 ; 52.96,29.4 52.96,29.08 53.28,28.77 U4.5 ; 52.96,29.4 52.18,29.4 51.82,29.77 51.82,31.6 51.03,32.38 v2(50.67,32.38) 50.15,32.91 50.15,33.26 48.16,35.26 44.09,35.26 43.28,36.07 41.2,36.07 R27.2
LED1_IN: length 5.8
  TOP w0.203: v1(40.64,38.48) 40.64,38.96 41.46,39.78 P1.9
  BOTTOM w0.203: v2(38.73,36.58) 39.57,36.58 R28.1 39.73,36.63 R27.1 v1(40.64,38.48)
LED2: length 22
  TOP w0.203: v1(41.4,38.48) 41.4,39.17 41.96,39.73 P1.8
  BOTTOM w0.203: 52.22,30.58 52.22,30.24 52.43,30.04 U4.7 ; 52.22,30.58 52.31,30.67 U4.8 ; 52.22,30.58 52.22,31.8 48.36,35.66 44.3,35.66 43.48,36.47 42.06,36.47 v2(41.66,36.88) 41.4,37.13 v1(41.4,38.48)
LED3: length 19.5
  TOP w0.203: P1.7 42.46,39.65 42.04,39.22 v1(42.04,38.99)
  BOTTOM w0.203: U4.10 52.69,31.94 52.63,32 ; 52.63,32 52.63,31.6 52.92,31.31 U4.9 ; 52.63,32 48.56,36.07 44.91,36.07 v2(44.3,36.68) 44.09,36.88 42.67,36.88 42.04,37.52 v1(42.04,38.99)
LED4: length 13.3
  BOTTOM w0.203: R29.2 44.65,38.15 v2(45.72,37.08) 46.33,36.47 48.77,36.47 52.03,33.21 52.73,33.21 ; 52.73,33.21 52.73,32.74 52.9,32.58 U4.11 ; 52.73,33.21 U4.12
LED5: length 24.2
  TOP w0.203: v1(43.46,39.37) P1.5
  BOTTOM w0.203: 60.86,33.22 60.86,32.82 60.62,32.58 U4.14 ; 60.86,33.22 60.85,33.21 U4.13 ; 60.86,33.22 60.86,33.83 60.66,34.04 51.82,34.04 48.97,36.88 47.42,36.88 v2(47.02,37.29) 46.61,37.69 46.33,37.69 45.11,38.91 43.92,38.91 v1(43.46,39.37)
LED6: length 25.6
  TOP w0.203: P1.4 43.96,39.8 v1(44.32,39.45)
  BOTTOM w0.203: U4.15 60.86,31.94 ; 60.86,31.94 60.86,31.51 60.66,31.31 U4.16 ; 60.86,31.94 61.26,32.34 61.26,34.04 60.86,34.44 52.02,34.44 49.17,37.29 47.96,37.29 46.74,38.51 v2(46.74,38.71) 46.45,38.99 45.64,38.99 45.19,39.45 v1(44.32,39.45)
LED7: length 17.5
  TOP w0.203: P2.20 58.11,41.56 60.96,38.71 v2(60.96,36.45) v1(60.96,35.05)
  BOTTOM w0.203: U4.17 60.77,30.67 60.91,30.53 ; 60.91,30.53 60.91,30.23 60.72,30.04 U4.18 ; 60.91,30.53 61.26,30.88 61.26,31.8 61.67,32.21 61.67,34.34 v1(60.96,35.05)
LED8: length 21.3
  TOP w0.203: P2.18 57.71,41.35 60.2,38.86 v2(60.2,37.85) 60.2,36.88 60.15,36.83 v1(60.15,35.05)
  BOTTOM w0.203: U4.19 60.85,29.4 ; 60.85,29.4 60.9,29.4 61.67,30.18 61.67,31.57 62.08,31.98 62.08,34.95 61.37,35.66 60.35,35.66 60.15,35.46 v1(60.15,35.05) ; 60.85,29.4 61.06,29.19 61.06,28.96 60.87,28.77 U4.20
LED9: length 21.9
  TOP w0.203: v1(62.48,29.08) 63.6,30.2 63.6,33.02 62.38,34.24 v2(61.98,34.24) 59.94,34.24 59.54,34.65 59.54,38.91 57.31,41.14 P2.16
  BOTTOM w0.203: U5.6 62.8,29.4 v1(62.48,29.08) 62.8,28.77 U5.5
LED10: length 20.5
  TOP w0.203: P2.14 56.91,40.93 59.13,38.71 59.13,34.44 60.15,33.43 v2(60.55,33.43) 62.59,33.43 63.2,32.82 63.2,31.06 v1(62.48,30.35)
  BOTTOM w0.203: U5.7 62.73,30.04 62.48,30.28 v1(62.48,30.35) 62.48,30.48 62.67,30.67 U5.8
LED11: length 18.7
  TOP w0.203: v1(62.48,31.5) 62.48,32.51 62.18,32.82 v2(61.98,32.82) 60.15,32.82 58.72,34.24 58.72,38.51 56.51,40.72 P2.12
  BOTTOM w0.203: U5.10 62.73,31.94 62.48,31.7 v1(62.48,31.5) 62.67,31.31 U5.9
LED12: length 20.8
  TOP w0.203: v2(57.91,34.44) 57.91,35.31 v1(58.04,35.43) 58.32,35.71 58.32,38.3 56.11,40.51 P2.10
  BOTTOM w0.203: U5.11 64.58,32.58 64.82,32.82 64.82,33.02 64.63,33.21 U5.12 63.14,33.21 62.84,33.51 62.84,35 61.77,36.07 58.67,36.07 v1(58.04,35.43)
LED13: length 26.4
  TOP w0.203: P2.8 55.71,40.3 57.91,38.1 57.91,36.45 v1(57.53,36.07)
  BOTTOM w0.203: 70.71,33.26 70.71,33.83 70.51,34.04 64.62,34.04 TP9.1 62.21,36.45 57.91,36.45 v1(57.53,36.07) ; 70.71,33.26 70.67,33.21 U5.13 ; 70.71,33.26 70.71,32.82 70.47,32.58 U5.14
LED14: length 30.7
  TOP w0.203: P2.6 55.31,40.09 57.51,37.9 57.51,36.91 56.79,36.2 v1(56.26,36.2)
  BOTTOM w0.203: 70.85,31.94 71.12,32.21 71.12,34.04 70.71,34.44 66.24,34.44 TP8.1 65.02,35.66 63.6,35.66 62.38,36.88 57.48,36.88 56.79,36.2 v1(56.26,36.2) ; 70.85,31.94 70.71,31.8 70.71,31.39 70.62,31.31 U5.16 ; 70.85,31.94 U5.15
LED15: length 31.1
  TOP w0.203: P2.4 54.91,39.88 57.02,37.77 57.02,37.33 v1(56.64,36.96)
  BOTTOM w0.203: v1(56.64,36.96) 57.02,37.33 62.54,37.33 63.32,36.55 TP7.1 65.15,36.55 66.85,34.85 70.92,34.85 71.53,34.24 71.53,31.57 70.63,30.67 U5.17 68.9,30.67 68.71,30.48 68.71,30.23 68.9,30.04 U5.18
LED16: length 27.9
  TOP w0.203: P2.2 54.51,39.67 56.26,37.92 v1(56.26,37.69)
  BOTTOM w0.203: v1(56.26,37.69) 56.79,37.69 57,37.9 62.59,37.9 63.2,37.29 66.24,37.29 TP6.1 68.28,35.26 71.12,35.26 72.34,34.04 72.34,31.24 72.47,31.11 R19.2
LED16_1: length 5.8
  BOTTOM w0.203: 70.74,29.46 70.68,29.4 U5.19 ; 70.74,29.46 70.74,30.23 71.12,30.61 R19.1 71.55,30.56 v2(72.34,29.77) ; 70.74,29.46 70.74,28.96 70.55,28.77 U5.20
LED_PTD: length 6.6
  TOP w0.203: P1.6 42.96,39.59 42.93,39.55 v1(42.93,37.46)
  BOTTOM w0.203: v2(42.88,38.38) 43.59,38.38 R29.1 ; v2(42.88,38.38) 42.88,39.17 42.49,39.55 R30.1 ; v2(42.88,38.38) 42.88,37.52 v1(42.93,37.46)
LED_PWR_EN: length 56.4
  TOP w0.203: v1(31.24,42.67) 30.35,43.56 30.35,45.47 29.84,45.97 20.32,45.97 18.41,44.07 16,44.07 15.16,43.23 v1(14.94,43.23) ; v1(47.5,28.83) U6.16
  BOTTOM w0.203: v1(31.24,42.67) 31.24,32.64 31.5,32.38 33.4,32.38 33.91,31.88 v2(33.91,28.07) 33.91,27.43 34.92,26.42 46.99,26.42 47.5,26.93 v1(47.5,28.83) ; v1(14.94,43.23) 13.69,43.23 R7.1
OUTEN: length 55.4
  TOP w0.203: U6.20 50.18,31.35 50.8,30.73 50.8,27.81 51.18,27.43 51.18,26.16 51.64,25.7 53.26,25.7 54.48,26.92 v1(61.47,26.92) 69.93,26.92 v1(70.82,27.81) 71.88,27.81 72.31,28.24 72.31,31.01 68.48,34.85 67.67,34.85 65.23,37.29 v1(65.23,39.52) 65.23,40.06 64.54,40.74 62.99,40.74 61.71,42.02 P2.38
  BOTTOM w0.203: v1(70.82,27.81) 70.5,28.13 U5.21 ; v1(65.23,39.52) TP2.1 ; U4.21 61.02,28.13 61.47,27.69 v1(61.47,26.92)
REXTA: length 3.8
  BOTTOM w0.203: v2(57.53,25.02) 57.61,25.1 R21.2 58.42,25.15 58.42,26.54 58.74,26.86 U4.23
REXTB: length 4
  BOTTOM w0.203: U5.23 68.52,26.86 68.07,26.42 68.07,25.07 R22.2 v2(67.18,25.02)
SDI: length 23.2
  TOP w0.203: v1(71.37,29.72) 71.37,30.73 68.07,34.04 67.06,34.04 62.79,38.3 v1(62.79,39.52) 62.79,39.73 60.91,41.6 P2.34
  BOTTOM w0.203: R20.1 R23.1 72.47,28.83 71.58,29.72 v1(71.37,29.72) ; TP4.1 63.2,39.12 v1(62.79,39.52)
SDO1: length 6.2
  BOTTOM w0.203: U4.22 60.69,27.5 60.86,27.33 60.86,26.31 61.65,25.53 v2(61.85,25.53) 62.1,25.53 62.69,26.11 62.69,26.52 63.03,26.86 U5.2
SDO2: length 3.1
  BOTTOM w0.203: U5.22 70.21,27.5 70.65,27.05 R20.2 71.55,26.21 v2(71.5,26.16)
SDO_BACK: length 5.5
  TOP w0.203: v1(61.57,39.52) 61.57,40.34 60.51,41.39 P2.32
  BOTTOM w0.203: TP5.1 v1(61.57,39.52)
SWIM_DATA: length 17.8
  TOP w0.203: v1(47.62,30.73) 47.62,31.85 46.7,32.77 U6.26
  BOTTOM w0.203: P3.2 42.82,24.64 46.86,24.64 48.26,26.03 v2(48.26,27.81) 48.26,30.1 v1(47.62,30.73)
UART_RX: length 17.1
  TOP w0.203: v1(36.2,29.72) D1.A 35.13,28.7 R25.2 ; U6.31 v1(42.7,33.02)
  BOTTOM w0.203: v2(35.36,29.77) 36.14,29.77 v1(36.2,29.72) 36.2,29.18 36.42,28.96 37.19,28.96 37.8,29.57 38.35,29.57 38.63,29.84 38.99,29.84 40.03,30.89 40.03,32.41 41.53,33.91 42.67,33.91 42.93,33.66 42.93,33.27 42.7,33.05 v1(42.7,33.02)
UART_RX1: length 5.1
  TOP w0.203: R25.1 35.05,27.36 34.11,26.42 32.18,26.42 P4.1
UART_TX: length 20.2
  TOP w0.203: v1(36.96,29.72) 36.83,29.59 36.83,26.8 36.58,26.54 34.92,26.54 33.88,25.5 P4.2 ; U6.30 v1(43.5,33.02)
  BOTTOM w0.203: v1(36.96,29.72) 37.33,30.1 38.22,30.1 38.48,30.35 38.79,30.35 39.62,31.19 39.62,32.61 41.3,34.29 42.93,34.29 43.31,33.91 43.31,33.27 43.5,33.08 v1(43.5,33.02)
UPU_RES: length 27.7
  TOP w0.203: v1(36.7,35.18) 36.7,36.2 37.08,36.58 38.3,36.58 38.68,36.2 C31.2 38.68,35.86 40,34.55 U6.1 ; v1(37.36,27.05) 37.36,26.77 37.72,26.42 45.47,26.42 45.93,25.96 P3.4
  BOTTOM w0.203: v1(37.36,27.05) 36.47,27.94 v2(35.56,27.94) 35.15,27.94 34.29,28.8 34.29,34.29 34.54,34.54 36.07,34.54 v1(36.7,35.18)
VERTICAL_SYNC: length 12.8
  TOP w0.203: v1(41.9,33.02) U6.32 41.9,36.98 41.16,37.72 R24.2 39.83,38.1 40.01,38.28 40.01,38.99 40.96,39.95 P1.10
  BOTTOM w0.203: v2(41.15,32.51) 41.66,33.02 v1(41.9,33.02) 42.28,32.64 42.29,32.64 43.06,31.87 U7.3
VS: length 4.5
  BOTTOM w0.305: v2(44.4,29.72) 44.15,29.97 R26.1
  BOTTOM w0.33: U7.2 42.63,31.37 C32.1
  BOTTOM w0.559: C32.1 R26.1
N16006904: length 5.2
  TOP w0.203: U6.18 49.75,29.75 50.04,29.46 50.04,26.03 TP10.1
N16006928: length 1.7
  TOP w0.203: TP11.1 49.99,32.13 49.97,32.15 U6.21
N16007072: length 2.4
  TOP w0.203: U6.15 v1(46.7,28.83)
  BOTTOM w0.203: TP12.1 46.74,29.36 46.74,28.86 v1(46.7,28.83)
N16007076: length 2.3
  TOP w0.203: U6.14 v1(45.9,28.83)
  BOTTOM w0.203: TP13.1 45.9,29.58 v1(45.9,28.83)
N16007080: length 3.2
  TOP w0.203: U6.13 v1(45.1,28.81)
  BOTTOM w0.203: v1(45.1,28.81) 45.1,28.68 46.1,27.69 TP14.1
N16007084: length 2.8
  TOP w0.203: U6.12 v1(44.3,28.83)
  BOTTOM w0.203: v1(44.3,28.83) 44.3,28.59 TP15.1
N16007088: length 2.6
  TOP w0.203: U6.11 v1(43.5,28.83)
  BOTTOM w0.203: TP16.1 43.5,28.1 v1(43.5,28.83)
N16007096: length 2.9
  TOP w0.203: U6.10 v1(42.7,28.83)
  BOTTOM w0.203: TP17.1 42.7,27.25 v1(42.7,28.83)
N16007100: length 2.3
  TOP w0.203: U6.9 v1(41.9,28.83)
  BOTTOM w0.203: v1(41.9,28.83) 41.9,28.19 TP18.1
N16007406: length 3.7
  TOP w0.203: TP21.1 48.01,28.32 48.63,28.95 U6.17
N16007454: length 2.7
  TOP w0.203: TP19.1 39.75,27.89 39.75,28.7 40,28.95 U6.8
N16007512: length 2.4
  TOP w0.203: TP20.1 39.42,28.88 39.42,29.44 39.73,29.75 U6.7
N16007570: length 3.9
  TOP w0.203: U6.25 v1(47.5,33.06)
  BOTTOM w0.203: v1(47.5,33.06) 47.88,33.44 47.88,33.91 TP22.1
N16007642: length 3.9
  TOP w0.203: U6.27 v1(45.9,33.04)
  BOTTOM w0.203: TP23.1 v1(45.9,33.04)
N16007646: length 4
  TOP w0.203: U6.28 v1(45.1,33.03)
  BOTTOM w0.203: v1(45.1,33.03) 45.1,33.83 TP24.1
N16007650: length 4.1
  TOP w0.203: U6.29 v1(44.3,33.03)
  BOTTOM w0.203: TP25.1 44.3,33.62 v1(44.3,33.03)

## Copper pours and planes (outline as drawn; the poured copper is in the pictures)
2V8 on TOP (solid shape): 33.4,41.91 33.4,39.75 33.53,39.62 35.81,39.62 36.2,39.24 36.2,34.92 35.94,34.67 34.67,34.67 34.16,34.16 34.16,33.15 33.78,32.77 30.61,32.77 30.35,33.02 30.35,36.2 31.5,37.34 31.5,41.91 31.75,42.16 33.15,42.16
2V8 on BOTTOM (solid shape): 36.07,39.75 36.07,35.43 35.56,34.92 34.54,34.92 34.04,34.42 34.04,32.77 33.91,32.64 31.75,32.64 31.5,32.89 31.5,41.91 31.75,42.16 33.66,42.16
2V8 on BOTTOM (solid shape): 55.5,46.1 55.5,41.78 55.12,41.4 53.85,41.4 53.34,40.89 49.28,40.89 49.15,41.02 49.15,45.59 49.71,46.15 55.45,46.15
2V8 on VCC (solid shape): 55.37,35.94 51.69,32.26 40.64,32.26 40.26,31.88 40.26,30.86 39.12,29.72 38.73,29.72 37.85,28.83 35.81,28.83 34.29,30.35 34.29,31.62 33.66,32.26 30.1,32.26 30.1,40.92 33.13,43.94 48.75,43.94 49.53,44.73 49.53,47.24 55.37,47.24
2V8_HMD on TOP (solid shape): 47.5,41.66 47.5,40.89 47.24,40.64 46.61,40.64 45.97,40 44.96,40 44.83,40.13 44.83,41.25 44.91,41.33 45.77,41.33 46.23,41.78 47.37,41.78
2V8_HMD on BOTTOM (solid shape): 48.9,42.04 48.9,40.51 48.64,40.26 45.97,40.26 45.85,40.39 45.85,41.27 46.23,41.66 46.23,42.16 46.35,42.29 48.64,42.29
2V8IN on TOP (solid shape): 58.22,46.81 58.22,45.01 58.12,44.91 58.12,44.15 58.04,44.07 56.08,44.07 56.01,44.15 56.01,45.92 55.91,46.02 55.91,46.89 56.01,46.99 58.04,46.99
2V8IN on TOP (solid shape): 67.94,46.74 67.94,44.32 67.69,44.07 65.41,44.07 63.5,45.97 61.98,45.97 61.82,45.82 61.82,44.17 61.72,44.07 60.55,44.07 60.45,44.17 60.45,44.7 60.4,44.75 60.4,46.81 60.58,46.99 67.69,46.99
2V8IN on BOTTOM (solid shape): 72.64,46.86 72.64,42.8 72.39,42.55 66.29,42.55 64.77,44.07 60.55,44.07 60.45,44.17 60.45,44.7 60.4,44.75 60.4,45.39 60.33,45.47 58.17,45.47 58.04,45.34 58.04,44.07 57.91,43.94 56.26,43.94 56.01,44.2 56.01,46.86 56.13,46.99 72.52,46.99
2V8IN on VCC (solid shape): 73.05,39.12 55.88,39.12 55.88,47.24 73.05,47.24
AGND on TOP (solid shape): 34.16,31.17 34.16,27.15 33.93,26.92 30.68,26.92 30.48,27.13 30.48,30.58 31.29,31.39 33.93,31.39
AGND on TOP (solid shape): 59.54,32.21 59.54,29.57 58.93,28.96 53.44,28.96 53.04,29.36 53.04,32.61 53.44,33.02 58.72,33.02
AGND on TOP (solid shape): 69.7,31.8 69.7,29.77 68.48,28.55 64.41,28.55 64.01,28.96 64.01,33.22 64.41,33.63 67.87,33.63
AGND on TOP (solid shape): 6.98,45.21 6.98,41.78 6.86,41.66 5.71,41.66 5.46,41.91 5.46,45.21 5.59,45.34 6.86,45.34
AGND on TOP (solid shape): 29.59,36.58 29.59,34.92 29.34,34.67 24.51,34.67 24.26,34.92 24.26,36.58 24.51,36.83 29.34,36.83
AGND on TOP (solid shape): 29.97,45.21 29.97,42.67 29.72,42.42 24.89,42.42 24.64,42.67 24.64,45.21 24.89,45.47 29.72,45.47
AGND on TOP (solid shape): 72.77,39.12 72.77,36.07 72.52,35.81 68.45,35.81 68.2,36.07 68.2,39.12 68.45,39.37 72.52,39.37
AGND on TOP (solid shape): 60.22,41.68 60.07,41.53 58.55,41.53 58.39,41.68 58.39,43.84 58.42,43.87 60.22,43.87
AGND on TOP (solid shape): 17.4,46.74 17.4,45.34 17.14,45.09 15.7,45.09 14.99,44.37 14.27,44.37 13.84,43.94 12.7,43.94 12.45,44.2 12.45,46.74 12.7,46.99 17.14,46.99
AGND on TOP (solid shape): 55.75,46.86 55.75,46.1 55.63,45.97 55.24,45.97 55.02,45.75 55.02,45.24 54.86,45.09 53.59,45.09 53.47,45.21 53.47,46.86 53.59,46.99 55.63,46.99
AGND on TOP (solid shape): 60.22,46.84 60.22,44.73 60.3,44.65 60.3,44.17 60.2,44.07 58.42,44.07 58.29,44.2 58.29,44.88 58.39,44.98 58.39,46.84 58.55,46.99 60.07,46.99
AGND on TOP (solid shape): 11.43,39.5 11.43,38.23 11.3,38.1 10.29,38.1 10.03,37.85 10.03,37.34 9.91,37.21 9.65,37.21 9.02,36.58 9.02,34.67 8.89,34.54 5.46,34.54 5.33,34.67 5.33,37.72 5.59,37.97 7.49,37.97 8.25,38.73 9.78,38.73 9.91,38.86 9.91,39.5 10.03,39.62 11.3,39.62
AGND on TOP (solid shape): 52.96,42.43 52.96,39.8 54.46,38.3 54.46,35.66 55.68,34.44 55.68,33.83 55.27,33.43 52.63,33.43 50.8,35.26 48.36,35.26 47.96,35.66 47.96,37.11 47.85,37.21 47.85,38.91 48.67,38.91 48.67,36.98 48.97,36.68 50.6,36.68 51.82,37.9 51.82,38.51 51.61,38.71 51.59,38.71 51.28,39.01 48.77,39.01 48.67,38.91 47.85,38.91 47.85,39.22 48.97,40.34 49.99,40.34 50.19,40.54 50.19,42.37 50.39,42.57 52.82,42.57
AGND on TOP (solid shape): 73.51,47.75 73.54,47.74 73.55,47.73 73.56,47.7 73.56,23.83 73.55,23.8 73.54,23.78 73.51,23.77 29.64,23.77 29.61,23.78 29.6,23.8 29.59,23.83 29.59,33.63 29.44,33.78 4.62,33.78 4.59,33.79 4.58,33.8 4.57,33.83 4.57,34.39 29.69,34.39 30.2,33.88 30.2,24.38 72.95,24.38 72.95,47.14 5.18,47.14 5.18,34.39 4.57,34.39 4.57,47.7 4.58,47.73 4.59,47.74 4.62,47.75
AGND on BOTTOM (solid shape): 55.75,46.86 55.75,46.48 55.63,46.35 52.83,46.35 52.7,46.48 52.7,46.86 52.83,46.99 55.63,46.99
AGND on BOTTOM (solid shape): 72.77,39.12 72.77,36.07 72.52,35.81 68.45,35.81 68.2,36.07 68.2,39.12 68.45,39.37 72.52,39.37
AGND on BOTTOM (solid shape): 60.2,45.21 60.2,44.75 60.3,44.65 60.3,44.17 60.15,44.02 58.39,44.02 58.27,44.15 58.27,45.29 58.32,45.34 60.07,45.34
AGND on BOTTOM (solid shape): 6.98,45.21 6.98,37.08 7.24,36.83 8.64,36.83 9.02,36.45 9.02,34.67 8.89,34.54 5.46,34.54 5.33,34.67 5.33,45.21 5.46,45.34 6.86,45.34
AGND on BOTTOM (solid shape): 58.5,33.45 58.5,27.1 56.08,24.69 53.44,24.69 53.24,24.89 53.24,25.5 53.44,25.7 54.86,25.7 55.3,26.14 55.3,33.45 55.47,33.63 58.32,33.63
AGND on BOTTOM (solid shape): 47.37,44.32 48.64,44.32 48.9,44.07 48.9,42.8 48.64,42.55 46.1,42.55 45.97,42.42 45.97,41.78 45.72,41.53 42.42,41.53 42.29,41.66 42.29,45.59 42.67,45.97 45.72,45.97
AGND on BOTTOM (solid shape): 68.28,33.43 68.28,27.13 66.45,25.3 66.45,24.89 66.24,24.69 63.2,24.69 62.99,24.89 62.99,25.5 63.2,25.7 64.41,25.7 65.07,26.37 65.07,32.26 65.43,32.61 65.43,33.43 65.63,33.63 68.07,33.63
AGND on BOTTOM (solid shape): 9.91,43.31 9.91,41.15 10.16,40.89 11.05,40.89 11.68,41.53 15.24,41.53 15.37,41.4 15.37,38.99 15.24,38.86 12.32,38.86 11.68,38.23 11.05,38.23 10.29,37.46 7.49,37.46 7.24,37.72 7.24,43.31 7.49,43.56 9.65,43.56
AGND on BOTTOM (solid shape): 73.51,47.75 73.54,47.74 73.55,47.73 73.56,47.7 73.56,23.83 73.55,23.8 73.54,23.78 73.51,23.77 29.64,23.77 29.61,23.78 29.6,23.8 29.59,23.83 29.59,33.63 29.44,33.78 4.62,33.78 4.59,33.79 4.58,33.8 4.57,33.83 4.57,34.39 29.69,34.39 30.2,33.88 30.2,24.38 72.95,24.38 72.95,47.14 5.18,47.14 5.18,34.39 4.57,34.39 4.57,47.7 4.58,47.73 4.59,47.74 4.62,47.75
AGND on GND (solid shape): 73.56,23.78 29.59,23.78 29.59,30.35 34.54,30.35 34.54,34.04 38.1,34.04 38.1,30.48 34.67,30.48 34.67,30.35 38.23,30.35 38.23,34.16 34.42,34.16 34.42,30.35 29.59,30.35 29.59,33.63 29.59,33.63 29.59,33.78 29.44,33.78 29.44,33.78 4.57,33.78 4.57,35.09 13.46,35.09 13.46,35.02 13.47,34.95 13.49,34.88 13.51,34.81 13.54,34.74 13.58,34.68 13.62,34.63 13.67,34.58 13.73,34.53 13.79,34.5 13.85,34.46 13.92,34.44 13.99,34.43 14.06,34.42 14.13,34.42 14.2,34.43 14.27,34.44 14.34,34.46 14.4,34.5 14.46,34.53 14.52,34.58 14.57,34.63 14.62,34.68 14.65,34.74 14.68,34.81 14.71,34.88 14.72,34.95 14.73,35.02 14.73,35.09 14.72,35.16 14.71,35.23 14.68,35.3 14.65,35.36 14.62,35.42 14.57,35.48 14.52,35.53 14.46,35.57 14.4,35.61 14.34,35.64 14.27,35.66 14.2,35.68 14.13,35.69 14.06,35.69 13.99,35.68 13.92,35.66 13.85,35.64 13.79,35.61 13.73,35.57 13.67,35.53 13.62,35.48 13.58,35.42 13.54,35.36 13.51,35.3 13.49,35.23 13.47,35.16 13.46,35.09 4.57,35.09 4.57,35.92 8.88,35.92 8.88,35.85 8.9,35.78 8.92,35.71 8.95,35.65 8.98,35.59 9.02,35.53 9.07,35.48 9.13,35.43 9.19,35.39 9.25,35.35 9.31,35.33 9.38,35.31 9.45,35.3 9.53,35.29 9.6,35.3 9.67,35.31 9.74,35.33 9.8,35.35 9.86,35.39 9.92,35.43 9.98,35.48 10.03,35.53 10.07,35.59 10.1,35.65 10.13,35.71 10.15,35.78 10.17,35.85 10.17,35.92 10.17,35.99 10.16,36.07 10.14,36.13 10.12,36.2 10.09,36.27 10.05,36.32 10,36.38 9.95,36.43 9.89,36.47 9.83,36.51 9.77,36.54 9.7,36.56 9.63,36.58 9.56,36.59 9.49,36.59 9.42,36.58 9.35,36.56 9.28,36.54 9.22,36.51 9.16,36.47 9.1,36.43 9.05,36.38 9,36.32 8.96,36.27 8.93,36.2 8.91,36.13 8.89,36.07 8.88,35.99 8.88,35.92 4.57,35.92 4.57,42.29 15.62,42.29 15.62,38.23 16.13,38.23 16.13,36.58 24.26,36.58 24.26,38.35 24.13,38.35 24.13,36.7 16.26,36.7 16.26,38.35 15.75,38.35 15.75,42.16 16.26,42.16 16.26,43.81 24.13,43.81 24.13,42.16 24.64,42.16 24.64,38.35 24.38,38.35 24.38,38.23 24.77,38.23 24.77,42.29 24.26,42.29 24.26,43.94 16.13,43.94 16.13,42.29 4.57,42.29 4.57,47.75 73.56,47.75
GND_IN on TOP (solid shape): 43.56,44.07 43.56,42.55 44.2,41.91 44.2,41.66 44.07,41.53 40.83,41.53 40.61,41.31 40.61,40 40.49,39.88 38.42,39.88 38.31,39.98 38.31,43.96 38.54,44.2 43.43,44.2
GND_IN on BOTTOM (solid shape): 42.04,44.07 42.04,41.53 41.78,41.27 40.89,41.27 40.26,40.64 40.01,40.64 39.37,41.27 38.61,41.27 38.35,41.53 38.35,44.07 38.61,44.32 41.78,44.32
VCC_5V on TOP (solid shape): 35.43,46.86 35.43,45.21 35.31,45.09 31.75,45.09 31.62,45.21 31.62,46.86 31.75,46.99 35.31,46.99
VCC_5V on TOP (solid shape): 11.81,46.74 11.81,44.2 11.56,43.94 11.05,43.94 10.79,44.2 10.03,44.2 9.78,43.94 9.78,41.78 10.03,41.53 10.03,40 9.91,39.88 9.78,39.88 9.65,39.75 9.65,39.12 9.5,38.96 8.23,38.96 7.49,38.23 5.59,38.23 5.46,38.35 5.46,40.26 5.59,40.39 6.22,40.39 6.35,40.51 6.35,41.27 6.48,41.4 6.98,41.4 7.24,41.66 7.24,46.74 7.49,46.99 11.56,46.99
VCC_5V on BOTTOM (solid shape): 14.06,46.99 14.15,46.94 14.15,46.84 14.3,46.2 14.95,46.24 14.99,46.25 15.37,46.1 15.75,46.25 16.13,46.1 16.51,46.25 16.54,46.24 17.2,46.2 17.34,46.84 17.35,46.94 17.43,46.99 41.91,46.99 42.04,46.86 42.04,44.7 41.78,44.45 32.77,44.45 32.39,44.07 10.79,44.07 10.67,44.2 10.16,44.2 10.03,44.07 7.87,44.07 7.62,44.32 7.62,46.61 8,46.99
VCC_5V on VCC (solid shape): 49.02,44.94 48.54,44.45 32.91,44.45 29.59,41.13 29.59,34.29 5.08,34.29 5.08,47.24 49.02,47.24
VCC_5VIN on TOP (solid shape): 38.11,44.14 38.11,39.95 38.04,39.88 35.18,39.88 34.92,40.13 34.92,44.07 35.13,44.27 37.97,44.27
VCC_5VIN on BOTTOM (solid shape): 38.1,44.2 38.1,41.53 37.85,41.27 35.31,41.27 35.05,41.53 35.05,43.81 35.18,43.94 36.96,43.94 37.34,44.32 37.97,44.32
3D3 on VCC (solid shape): 73.05,38.61 73.05,24.28 30.1,24.28 30.1,31.75 33.4,31.75 33.78,31.37 33.78,30.1 35.56,28.32 38.1,28.32 38.99,29.21 39.37,29.21 40.77,30.61 40.77,31.62 40.89,31.75 51.93,31.75 55.88,35.7 55.88,38.61 66.8,38.61 66.85,38.61
DD_OUT on TOP (solid shape): 31.24,41.91 31.24,37.46 30.86,37.08 21.84,37.08 21.59,37.34 21.59,41.91 21.84,42.16 30.99,42.16
DD_SW on TOP (solid shape): 18.41,42.29 18.41,38.35 18.29,38.23 12.93,38.23 12.7,38.46 11.79,38.46 11.68,38.56 11.68,39.62 11.81,39.75 11.81,40.39 12.19,40.77 12.19,41.27 12.45,41.53 12.7,41.53 12.83,41.66 12.83,42.55 13.08,42.8 17.91,42.8
LDO_INA on TOP (solid shape): 47.55,39.65 47.55,39.01 47.52,38.99 46.89,38.99 46.74,38.84 46.74,38.05 46.81,37.97 47.52,37.97 47.55,37.95 47.55,37.08 47.42,36.96 45.09,36.96 44.96,37.08 44.96,38.99 45.09,39.12 46.28,39.12 46.89,39.73 47.47,39.73

## Text on the board
Ref Des/Silkscreen Bottom: P/N:00.Z6206G001 | Rev:A | e1
Ref Des/Silkscreen Top: DVT | A | IR_BOARD | OSVR
NCLEGEND-1-4: FIGURE | SIZE | 12.0 | 32.0 | DRILL CHART: TOP to BOTTOM | ALL UNITS ARE IN MILS | PLATED | QTY | 310 | 8
User.6: H=1.3MM
